# EAGLE board Fabulaser (EAGLE 9.6.2)
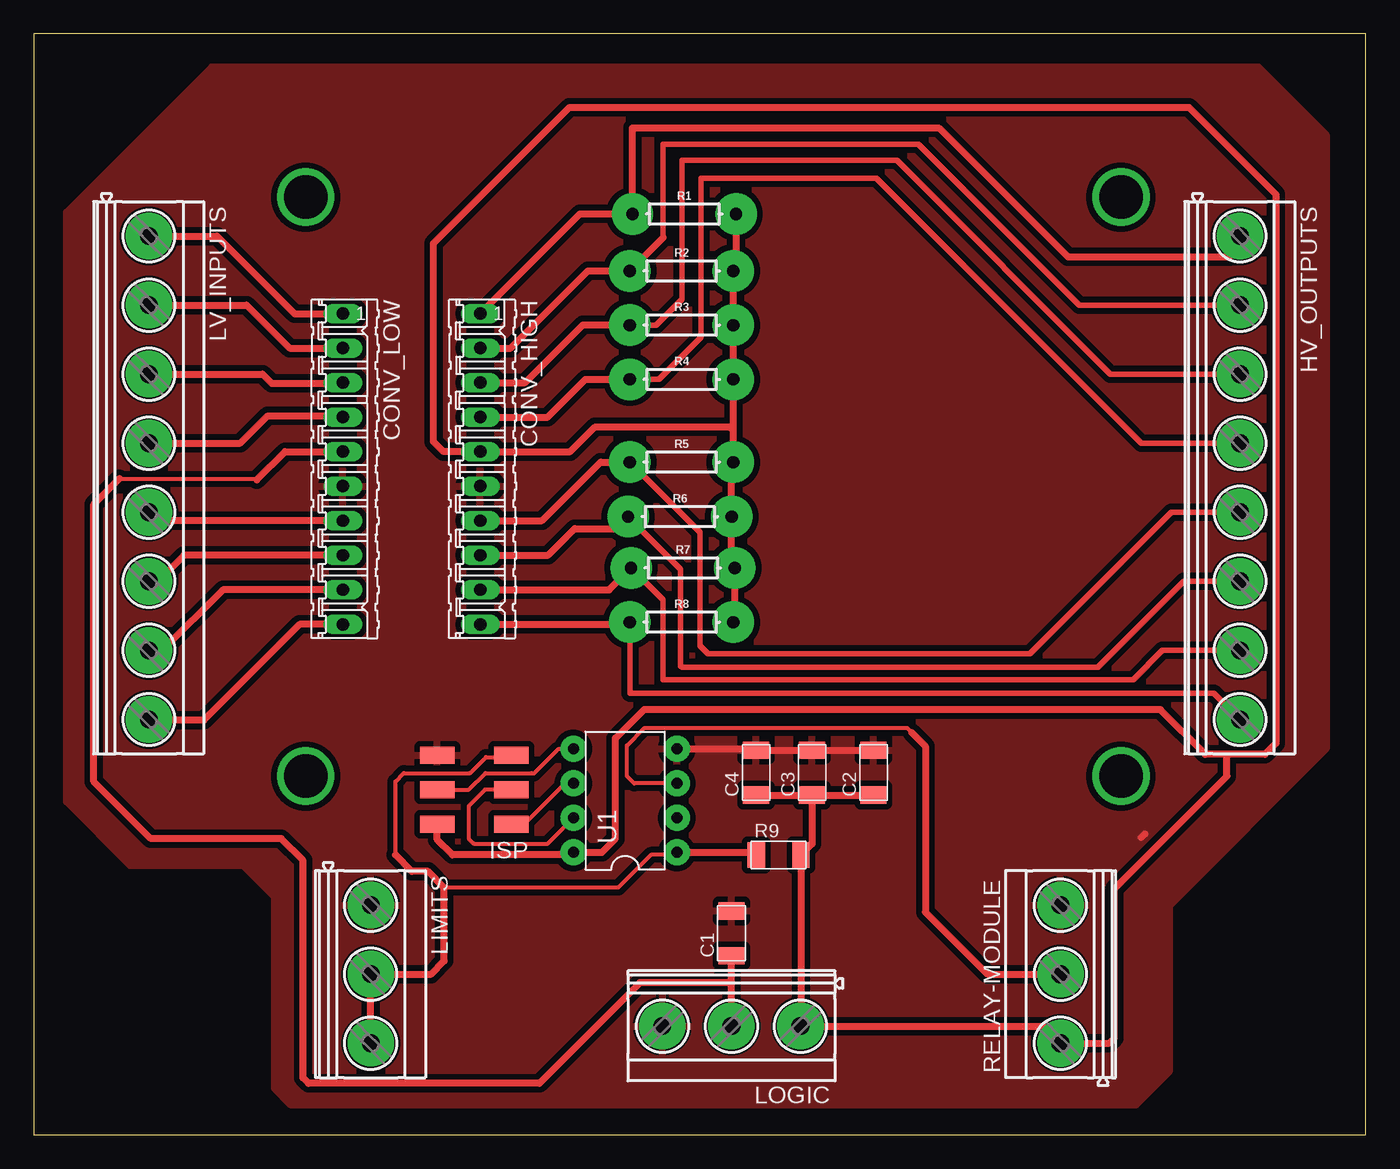
[diagram p0: board, top side]

Size 98 x 81 mm. Coordinates in mm from the lower left corner, seen from the top.
Outline: 0,0 98,0 98,81 0,81 0,0
Copper layers (1*16): Top 0.035mm / dielectric 1.5mm / Bottom 0.035mm
Design rules "default *": minimum track width 6mil, minimum drill 0.35mm, track to track 17mil, track to pad 17mil, pad to pad 17mil, via to via 17mil, smd to smd 17mil, copper to edge 40mil, drill to drill 6mil, minimum pad ring 10mil, minimum via ring 8mil, stop-mask expansion 4mil, vias tented up to drill 0mil, thermal gap 17mil

## Footprints (pad centres in the part's own frame; a part is rotated, then mirrored left to right if it is on the bottom)
C1206FAB = smd 1.27 x 1.905: 1 -1.651,0; 2 1.651,0
10P = drill 0.914 long: 1 -11.43,0; 2 -8.89,0; 3 -6.35,0; 4 -3.81,0; 5 -1.27,0; 6 1.27,0; 7 3.81,0; 8 6.35,0; 9 8.89,0; 10 11.43,0
MKDSN1,5/8-5,08 = drill 1.3 pad 3.429: 1 -17.801,0.025; 2 -12.721,0.025; 3 -7.641,0.025; 4 -2.561,0.025; 5 2.519,0.025; 6 7.599,0.025; 7 12.679,0.025; 8 17.759,0.025
2X03SMD = smd 2.54 x 1.27: 1 -2.54,2.54; 2 2.92,2.54; 3 -2.54,0; 4 2.92,0; 5 -2.54,-2.54; 6 2.92,-2.54
MKDSN1,5/3-5,08 = drill 1.3 pad 3.429: 1 -7.641,0.025; 2 -2.561,0.025; 3 2.519,0.025
AXIAL-0.3 = drill 0.9 pad 3.048: P$1 -3.81,0; P$2 3.81,0
R1206FAB = smd 1.27 x 1.905: 1 -1.651,0; 2 1.651,0
PDIP08_300MIL = drill 0.813 pad 1.905: 1 -3.81,-3.81; 2 -1.27,-3.81; 3 1.27,-3.81; 4 3.81,-3.81; 5 3.81,3.81; 6 1.27,3.81; 7 -1.27,3.81; 8 -3.81,3.81

## Placement (x,y rotation side)
C1  1uF  [C1206FAB]  51.34,14.83 90 top
C2  10uF  [C1206FAB]  61.79,26.66 90 top
C3  1uF  [C1206FAB]  57.27,26.66 90 top
C4  0.1uF  [C1206FAB]  53.15,26.66 90 top
CONV_HIGH  [10P]  32.85,49 270 top
CONV_LOW  [10P]  22.73,49 270 top
HV_OUTPUTS  MKDSN1,5/8-5,08  [MKDSN1,5/8-5,08]  88.74,48.33 270 top
ISP  AVRISPSMD  [2X03SMD]  32.6,25.4 180 top
LIMITS  MKDSN1,5/3-5,08  [MKDSN1,5/3-5,08]  24.76,9.27 270 top
LOGIC  MKDSN1,5/3-5,08  [MKDSN1,5/3-5,08]  48.77,8.03 180 top
LV_INPUTS  MKDSN1,5/8-5,08  [MKDSN1,5/8-5,08]  8.44,48.33 270 top
R1  1k  [AXIAL-0.3]  47.86,67.76 0 top
R2  1k  [AXIAL-0.3]  47.66,63.57 0 top
R3  1k  [AXIAL-0.3]  47.66,59.58 0 top
R4  1k  [AXIAL-0.3]  47.66,55.59 0 top
R5  1k  [AXIAL-0.3]  47.66,49.5 0 top
R6  1k  [AXIAL-0.3]  47.54,45.49 0 top
R7  1k  [AXIAL-0.3]  47.76,41.72 0 top
R8  1k  [AXIAL-0.3]  47.66,37.73 0 top
R9  10K  [R1206FAB]  54.8,20.6 0 top
RELAY-MODULE  MKDSN1,5/3-5,08  [MKDSN1,5/3-5,08]  75.57,14.39 90 top
U1  ATTINY45-20P  [PDIP08_300MIL]  43.51,24.6 90 top

## Library data of the parts
C1-C4 R9 = fab
CONV_HIGH CONV_LOW = con-amp-quick; OC_FARNELL: unknown; OC_NEWARK: unknown
HV_OUTPUTS LIMITS LOGIC LV_INPUTS RELAY-MODULE = con-phoenix-508
ISP = fab; SPICEPREFIX: X
R1-R7 = SparkFun-Resistors; PROD_ID: RES-08380
R8 = SparkFun-Resistors; PROD_ID: RES-12182
U1 = _hhn_attiny25_45_85

## Nets
3V3: C1.1 CONV_LOW.5 LOGIC.2
5V: C2.1 C3.1 C4.1 CONV_HIGH.5 ISP.2 LOGIC.1 R1.P$2 R2.P$2 R3.P$2 R4.P$2 R5.P$2 R6.P$2 R7.P$2 R8.P$2 R9.2 RELAY-MODULE.1 U1.8
GND: C1.2 C2.2 C3.2 C4.2 CONV_HIGH.6 CONV_LOW.6 ISP.6 LIMITS.1 LOGIC.3 RELAY-MODULE.3 U1.4
HV1: CONV_HIGH.1 HV_OUTPUTS.1 R1.P$1
HV2: CONV_HIGH.2 HV_OUTPUTS.2 R2.P$1
HV3: CONV_HIGH.3 HV_OUTPUTS.3 R3.P$1
HV4: CONV_HIGH.4 HV_OUTPUTS.4 R4.P$1
HV5: CONV_HIGH.7 HV_OUTPUTS.5 R5.P$1
HV6: CONV_HIGH.8 HV_OUTPUTS.6 R6.P$1
HV7: CONV_HIGH.9 HV_OUTPUTS.7 R7.P$1
HV8: CONV_HIGH.10 HV_OUTPUTS.8 R8.P$1
LV1: CONV_LOW.1 LV_INPUTS.1
LV2: CONV_LOW.2 LV_INPUTS.2
LV3: CONV_LOW.3 LV_INPUTS.3
LV4: CONV_LOW.4 LV_INPUTS.4
LV5: CONV_LOW.7 LV_INPUTS.5
LV6: CONV_LOW.8 LV_INPUTS.6
LV7: CONV_LOW.9 LV_INPUTS.7
LV8: CONV_LOW.10 LV_INPUTS.8
MISO: ISP.1 U1.6
MOSI: ISP.4 U1.5
RELAY: RELAY-MODULE.2 U1.3
RST: ISP.5 LIMITS.2 LIMITS.3 R9.1 U1.1
SCK: ISP.3 U1.7

## Tracks (layer width: path | path; a pad name or v marks a point on that pad's centre or on a via)
3V3
  Top 0.305: 6.28,48.28 16.32,48.28 16.4,48.2
  Top 0.508: LOGIC.2 51.33,11.2 | 51.33,11.2 51.33,12.67 50.85,13.15 C1.1 | CONV_LOW.5 18.47,50.27 16.4,48.2 | 6.28,48.28 4.4,46.4 4.4,26 8.6,21.8 18.2,21.8 19.8,20.2 19.8,4.2 20.2,3.8 37.2,3.8 44.6,11.2 51.33,11.2
5V
  Top 0.508: LOGIC.1 56.8,8 | 56.8,8 74.29,8 RELAY-MODULE.1 79.15,6.75 79.5,7.1 79.5,18.1 87.8,26.4 87.8,28 | C4.1 C3.1 | C3.1 C2.1 | C3.1 57.27,21.42 R9.2 56.45,8.35 56.8,8 | R8.P$2 51.57,37.83 R7.P$2 51.35,41.94 R6.P$2 51.35,49.38 R5.P$2 51.47,51.8 | R1.P$2 51.67,63.77 R2.P$2 51.7,63.8 51.8,63.8 51.47,63.47 R3.P$2 R4.P$2 51.47,51.8 | ISP.2 29.68,21.72 30.8,20.6 39.51,20.6 U1.8 41.79,20.79 42.8,21.8 42.8,29.2 44.9,31.3 82.9,31.3 86.2,28 87.8,28 | 51.47,51.8 51.17,52.1 41.3,52.1 39.47,50.27 CONV_HIGH.5 30.13,50.27 29.4,51 29.4,65.6 39.4,75.6 85,75.6 91.4,69.2 91.4,28.8 90.6,28 87.8,28
GND
  Top 0.305: 29.6,27.94 ISP.6 | LIMITS.1 24.11,16.91
  Top 0.508: C2.2 C3.2 C4.2 53.05,28.41 U1.4 | 81.5,21.9 81.74,22.14 81.77,22.14
  pour Top (isolate 0.432): 2.4,67.9 13.1,78.6 90.1,78.6 95.1,73.6 95.1,28.4 83.54,16.84 83.54,4.64 81.1,2.2 18.9,2.2 17.7,3.4 17.7,17.5 15.4,19.8 7.1,19.8 2.4,24.5
HV1
  Top 0.508: CONV_HIGH.1 40.18,67.76 R1.P$1 44.05,74.1 66.6,74.1 76.1,64.6 88,64.6 88.77,65.36 HV_OUTPUTS.1
HV2
  Top 0.406: 46.3,66.02 46.3,72.9 65.1,72.9 76.95,61.05 HV_OUTPUTS.2
  Top 0.508: CONV_HIGH.2 35.09,57.89 40.77,63.57 R2.P$1 46.3,66.02
HV3
  Top 0.406: R3.P$1 45.78,59.58 47.7,61.5 47.7,71.7 63.5,71.7 79.23,55.97 HV_OUTPUTS.3
  Top 0.508: CONV_HIGH.3 36.15,55.35 40.4,59.6 43.83,59.6 R3.P$1
HV4
  Top 0.406: R4.P$1 45.99,55.59 49.1,58.7 49.1,70.4 62,70.4 81.51,50.89 HV_OUTPUTS.4
  Top 0.508: CONV_HIGH.4 37.81,52.81 40.59,55.59 R4.P$1
HV5
  Top 0.406: R5.P$1 49,44.35 49,36 49.6,35.4 73.3,35.4 83.71,45.81 HV_OUTPUTS.5
  Top 0.508: CONV_HIGH.7 37.39,45.19 41.7,49.5 R5.P$1
HV6
  Top 0.406: R6.P$1 47.6,41.62 47.6,34.5 47.7,34.4 78.3,34.4 84.63,40.73 HV_OUTPUTS.6
  Top 0.508: CONV_HIGH.8 37.85,42.65 39.8,44.6 42.84,44.6 R6.P$1
HV7
  Top 0.406: R7.P$1 46.3,39.37 46.3,33.5 80.9,33.5 83.05,35.65 HV_OUTPUTS.7
  Top 0.508: CONV_HIGH.9 42.34,40.11 R7.P$1
HV8
  Top 0.406: R8.P$1 43.85,32.5 86.84,32.5 HV_OUTPUTS.8
  Top 0.508: CONV_HIGH.10 43.69,37.57 R8.P$1
LV1
  Top 0.508: LV_INPUTS.1 13.47,66.13 19.2,60.4 22.7,60.4 CONV_LOW.1
LV2
  Top 0.508: LV_INPUTS.2 15.65,61.05 18.81,57.89 CONV_LOW.2
LV3
  Top 0.508: LV_INPUTS.3 16.83,55.97 17.5,55.3 22.68,55.3 CONV_LOW.3
LV4
  Top 0.508: LV_INPUTS.4 15.19,50.89 17.2,52.9 22.64,52.9 CONV_LOW.4
LV5
  Top 0.508: CONV_LOW.7 9.09,45.19 LV_INPUTS.5
LV6
  Top 0.508: CONV_LOW.8 11.05,42.65 9.13,40.73 LV_INPUTS.6
LV7
  Top 0.508: CONV_LOW.9 13.91,40.11 9.45,35.65 LV_INPUTS.7
LV8
  Top 0.508: CONV_LOW.10 19.57,37.57 12.5,30.5 8.54,30.5 LV_INPUTS.8
MISO
  Top 0.305: ISP.1 36.06,22.86 39.07,25.87 U1.6
MOSI
  Top 0.305: U1.5 38.61,28.41 36.8,26.6 36.67,26.6 36.65,26.62 33.22,26.62 32,25.4 ISP.4
N$1  (via drill 3.2)
  other vias: 20,69
N$2  (via drill 3.2)
  other vias: 80,69
N$3  (via drill 3.2)
  other vias: 80,26.4
N$4  (via drill 3.2)
  other vias: 20,26.4
RELAY
  Top 0.305: U1.3 44.17,25.87 43.64,26.4 43.64,28.64 44.95,29.95 64.25,29.95 64.6,29.6
  Top 0.508: 64.6,29.6 65.6,28.6 65.6,16.4 70.17,11.83 RELAY-MODULE.2
RST
  Top 0.305: 26.6,20.6 26.6,26 27.22,26.62 32.09,26.62 33.27,27.8 34.86,27.8 35,27.94 | 30.2,18.2 43,18.2 45.4,20.6 47.13,20.6 U1.1
  Top 0.508: U1.1 52.96,20.79 R9.1 | LIMITS.3 LIMITS.2 29.23,11.83 30.2,12.8 30.2,18.2 29,19.4 27.8,19.4 26.6,20.6 | ISP.5 35,27.94
SCK
  Top 0.305: U1.7 37.81,21.44 32.36,21.44 32,21.8 32,24.2 33.2,25.4 ISP.3